# EAGLE board driver_schnellx (EAGLE 5.11)
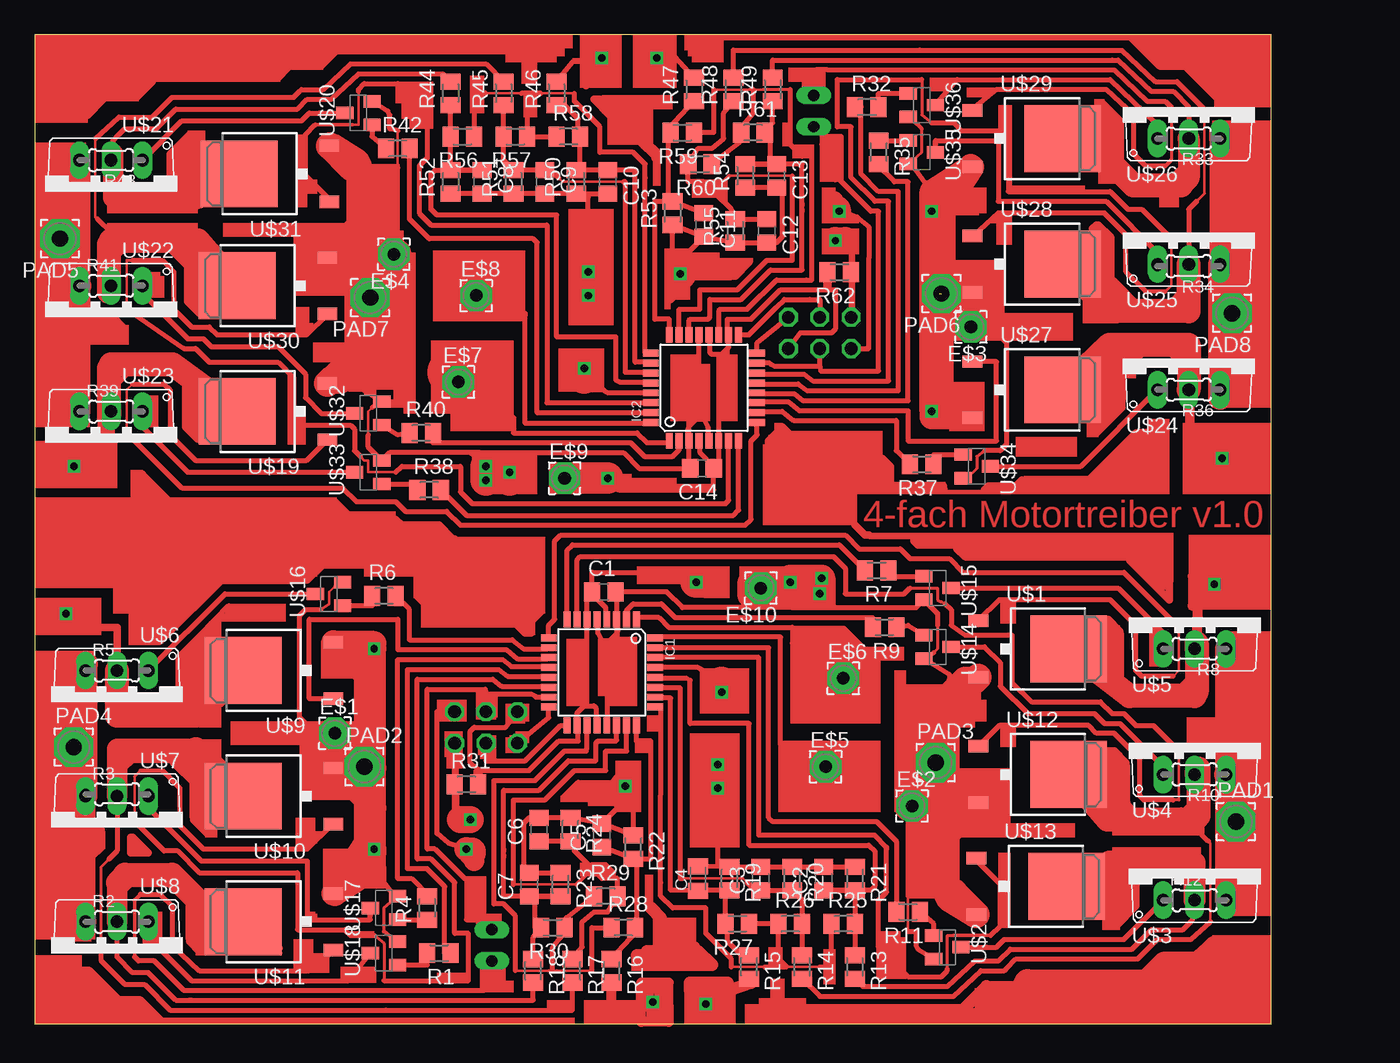
[diagram p0: board, top side]
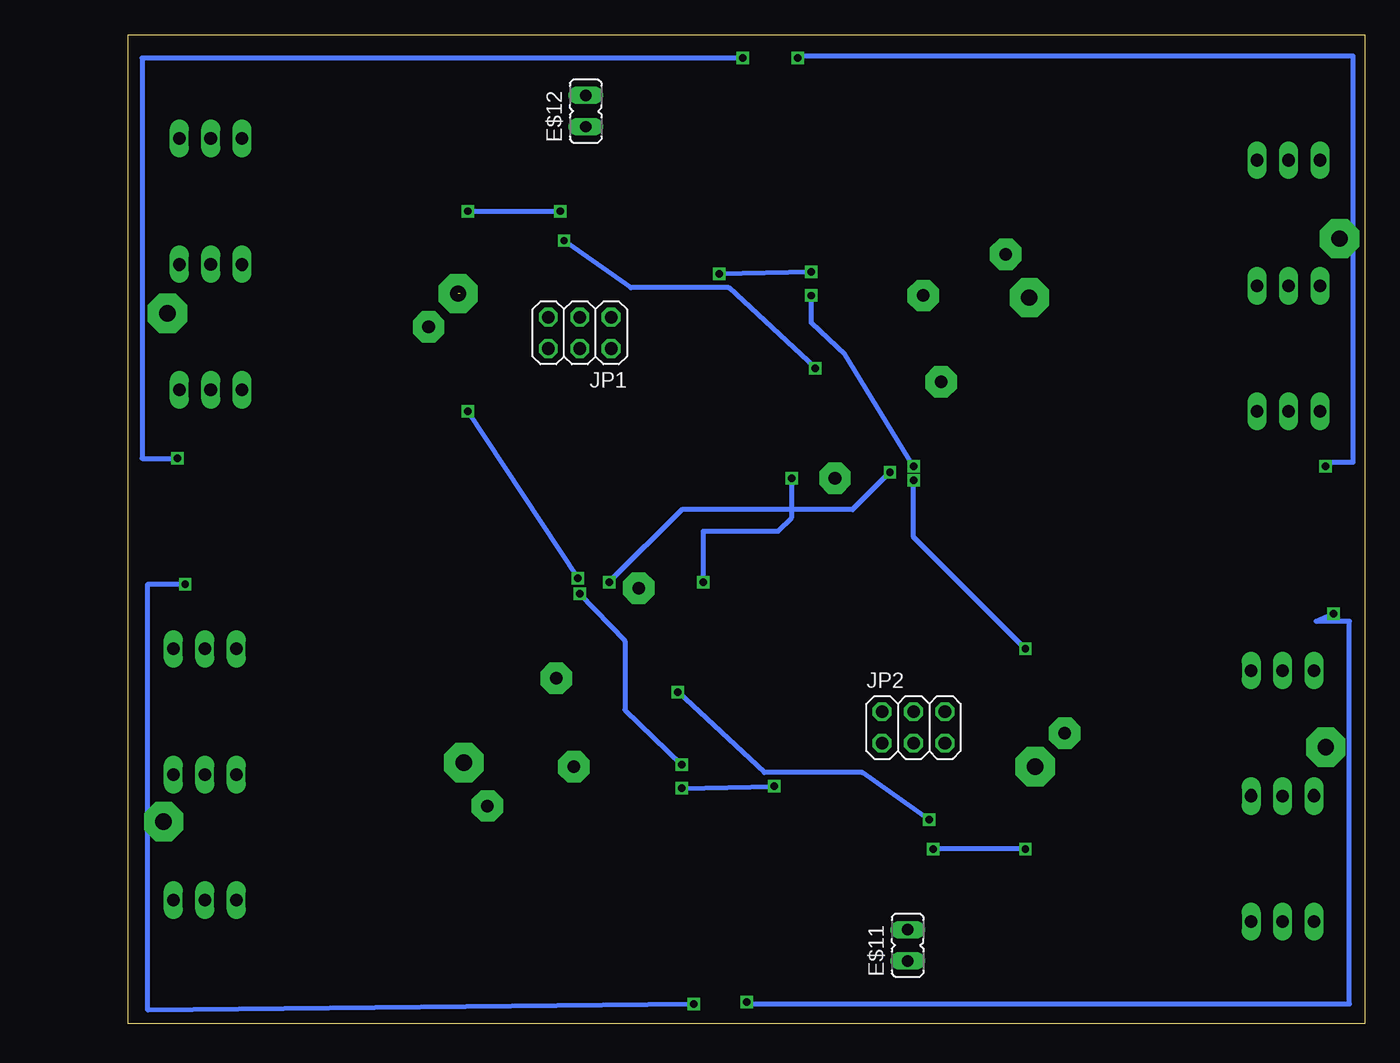
[diagram p1: board, bottom side, seen from below]

Size 100 x 80 mm. Coordinates in mm from the lower left corner, seen from the top.
Outline: 0,0 100,0 100,80 0,80 0,0
Copper layers (1*16): Top 0.035mm / dielectric 1.5mm / Bottom 0.035mm
Design rules "default": minimum track width 10mil, minimum drill 24mil, track to track 8mil, track to pad 8mil, pad to pad 8mil, via to via 8mil, smd to smd 8mil, copper to edge 40mil, drill to drill 8mil, minimum pad ring 10mil, minimum via ring 8mil, stop-mask expansion 4mil, vias tented up to drill 0mil, thermal gap 10mil
Net classes: 0 default: clearance 0.508 mm

## Footprints (pad centres in the part's own frame; a part is rotated, then mirrored left to right if it is on the bottom)
C0805 = smd 1.3 x 1.5: 1 -0.95,0; 2 0.95,0
C0805K = smd 1.3 x 1.6: 1 -1,0; 2 1,0
2,54/1,0 = drill 1.016 pad 2.54 octagon: 1 0,0
JP1Y = drill 0.914 long: 1 0,-1.27; 2 0,1.27
TQFP32-08 = smd 1.27 x 0.559: 1 -4.293,2.8; 2 -4.293,2; 3 -4.293,1.2; 4 -4.293,0.4; 5 -4.293,-0.4; 6 -4.293,-1.2; 7 -4.293,-2; 8 -4.293,-2.8; 17 4.293,-2.8; 18 4.293,-2; 19 4.293,-1.2; 20 4.293,-0.4; 21 4.293,0.4; 22 4.293,1.2; 23 4.293,2; 24 4.293,2.8 | smd 0.559 x 1.27: 9 -2.8,-4.293; 10 -2,-4.293; 11 -1.2,-4.293; 12 -0.4,-4.293; 13 0.4,-4.293; 14 1.2,-4.293; 15 2,-4.293; 16 2.8,-4.293; 25 2.8,4.293; 26 2,4.293; 27 1.2,4.293; 28 0.4,4.293; 29 -0.4,4.293; 30 -1.2,4.293; 31 -2,4.293; 32 -2.8,4.293
2X03 = drill 1.016 octagon: 1 -2.54,-1.27; 2 -2.54,1.27; 3 0,-1.27; 4 0,1.27; 5 2.54,-1.27; 6 2.54,1.27
3,17/1,3 = drill 1.321 pad 3.175 octagon: 1 0,0
M0805 = smd 1.3 x 1.6: 1 -0.95,0; 2 0.95,0
0204/5 = drill 0.813 octagon: 1 -2.54,0; 2 2.54,0
TO252 = smd 1 x 1.6: 1 -2.28,-4.8; 2 2.28,-4.8 | smd 5.4 x 6.2: 3 0,2.5
SOT23-BEC = smd 1 x 1.4: B -0.95,-1.1; C 0,1.1; E 0.95,-1.1
TO220V = drill 1.016 long: 1 -2.54,-2.54; 2 0,-2.54; 3 2.54,-2.54

## Placement (x,y rotation side)
C1  [C0805]  46.04,34.92 0 top
C2  [C0805]  63.82,11.75 90 top
C3  [C0805]  58.74,11.75 90 top
C4  [C0805K]  53.66,11.75 90 top
C5  [C0805]  45.88,15.24 90 top
C6  [C0805]  40.8,15.72 90 top
C7  [C0805]  40.01,11.27 90 top
C8  [C0805]  36.2,68.1 270 top
C9  [C0805]  41.27,68.1 270 top
C10  [C0805]  46.35,68.1 270 top
C11  [C0805]  54.13,64.61 270 top
C12  [C0805]  59.21,64.13 270 top
C13  [C0805]  60.01,68.58 270 top
C14  [C0805]  53.98,44.93 180 top
E$1  [2,54/1,0]  24.29,23.5 0 top
E$2  [2,54/1,0]  70.96,17.62 0 top
E$3  [2,54/1,0]  75.72,56.36 180 top
E$4  [2,54/1,0]  29.05,62.23 180 top
E$5  [2,54/1,0]  63.98,20.8 0 top
E$6  [2,54/1,0]  65.41,27.94 0 top
E$7  [2,54/1,0]  34.29,51.91 0 top
E$8  [2,54/1,0]  35.72,58.9 0 top
E$9  [2,54/1,0]  42.86,44.13 0 top
E$10  [2,54/1,0]  58.74,35.24 180 top
E$11  [JP1Y]  36.99,6.35 0 bottom
E$12  [JP1Y]  63.02,73.82 0 bottom
IC1  MEGA8-AI  [TQFP32-08]  45.88,28.42 270 top
IC2  MEGA8-AI  [TQFP32-08]  54.13,51.44 90 top
JP1  ISP 1  [2X03]  63.5,55.88 180 bottom
JP2  ISP 1  [2X03]  36.51,23.97 0 bottom
PAD1  11,1V_Motor1  [3,17/1,3]  97.16,16.35 0 top
PAD2  GND  [3,17/1,3]  26.67,20.8 0 top
PAD3  GND  [3,17/1,3]  72.87,21.11 0 top
PAD4  11,1V_Motor2  [3,17/1,3]  3.18,22.38 0 top
PAD5  11,1V_Motor1  [3,17/1,3]  2.06,63.5 180 top
PAD6  GND  [3,17/1,3]  73.34,59.05 180 top
PAD7  GND  [3,17/1,3]  27.15,58.74 180 top
PAD8  11,1V_Motor2  [3,17/1,3]  96.84,57.47 180 top
R1  [M0805]  32.7,5.72 180 top
R2  [0204/5]  6.67,8.26 0 top
R3  [0204/5]  6.67,18.57 0 top
R4  [M0805]  31.75,9.37 90 top
R5  [0204/5]  6.67,28.57 0 top
R6  [M0805]  28.26,34.61 0 top
R7  [M0805]  68.1,36.67 180 top
R8  [0204/5]  93.82,30.32 180 top
R9  [M0805]  68.74,32.07 180 top
R10  [0204/5]  93.82,20.16 180 top
R11  [M0805]  70.64,9.05 180 top
R12  [0204/5]  93.82,10 0 top
R13  4,7k  [M0805]  66.36,4.6 270 top
R14  4,7k  [M0805]  62.07,4.6 270 top
R15  4,7k  [M0805]  57.78,4.6 270 top
R16  4,7k  [M0805]  46.67,4.29 270 top
R17  4,7k  [M0805]  43.5,4.29 270 top
R18  4,7k  [M0805]  40.32,4.29 270 top
R19  1,2k  [M0805]  56.2,11.75 270 top
R20  1,2k  [M0805]  61.28,11.75 270 top
R21  1,2k  [M0805]  66.36,11.75 270 top
R22  1,2k  [M0805]  48.42,14.29 270 top
R23  1,2k  [M0805]  42.55,11.27 270 top
R24  1,2k  [M0805]  43.34,15.72 270 top
R25  1,2k  [M0805]  65.4,8.1 0 top
R26  1,2k  [M0805]  61.12,8.1 0 top
R27  1,2k  [M0805]  56.83,8.1 180 top
R28  1,2k  [M0805]  47.62,7.78 0 top
R29  1,2k  [M0805]  46.2,10.32 0 top
R30  1,2k  [M0805]  41.91,7.78 180 top
R31  [M0805]  34.92,19.37 0 top
R32  [M0805]  67.31,74.14 0 top
R33  [0204/5]  93.34,71.6 180 top
R34  [0204/5]  93.34,61.28 180 top
R35  [M0805]  68.26,70.48 270 top
R36  [0204/5]  93.34,51.28 180 top
R37  [M0805]  71.75,45.24 180 top
R38  [M0805]  31.91,43.18 0 top
R39  [0204/5]  6.19,49.53 0 top
R40  [M0805]  31.27,47.78 0 top
R41  [0204/5]  6.19,59.69 0 top
R42  [M0805]  29.37,70.8 0 top
R43  [0204/5]  6.19,69.85 180 top
R44  4,7k  [M0805]  33.66,75.25 90 top
R45  4,7k  [M0805]  37.94,75.25 90 top
R46  4,7k  [M0805]  42.23,75.25 90 top
R47  4,7k  [M0805]  53.34,75.56 90 top
R48  4,7k  [M0805]  56.52,75.56 90 top
R49  4,7k  [M0805]  59.69,75.56 90 top
R50  1,2k  [M0805]  43.81,68.1 90 top
R51  1,2k  [M0805]  38.74,68.1 90 top
R52  1,2k  [M0805]  33.66,68.1 90 top
R53  1,2k  [M0805]  51.59,65.56 90 top
R54  1,2k  [M0805]  57.47,68.58 90 top
R55  1,2k  [M0805]  56.67,64.13 90 top
R56  1,2k  [M0805]  34.61,71.76 180 top
R57  1,2k  [M0805]  38.89,71.76 180 top
R58  1,2k  [M0805]  43.18,71.75 0 top
R59  1,2k  [M0805]  52.39,72.07 180 top
R60  1,2k  [M0805]  53.82,69.53 180 top
R61  1,2k  [M0805]  58.1,72.07 0 top
R62  [M0805]  65.09,60.8 180 top
U$1  IRLR024  [TO252]  81.12,30.32 270 top
U$2  SMTBA42  [SOT23-BEC]  73.82,6.19 270 top
U$3  IRF9Z34N  [TO220V]  93.82,12.54 0 top
U$4  IRF9Z34N  [TO220V]  93.82,22.7 0 top
U$5  IRF9Z34N  [TO220V]  93.82,32.86 0 top
U$6  IRF9Z34N  [TO220V]  6.67,26.04 180 top
U$7  IRF9Z34N  [TO220V]  6.67,15.88 180 top
U$8  IRF9Z34N  [TO220V]  6.67,5.72 180 top
U$9  IRLR024  [TO252]  19.37,28.58 90 top
U$10  IRLR024  [TO252]  19.37,18.42 90 top
U$11  IRLR024  [TO252]  19.37,8.26 90 top
U$12  IRLR024  [TO252]  81.12,20.16 270 top
U$13  IRLR024  [TO252]  80.96,11.11 270 top
U$14  SMTBA42  [SOT23-BEC]  73.03,30.48 270 top
U$15  SMTBA42  [SOT23-BEC]  73.03,35.24 270 top
U$16  SMTBA42  [SOT23-BEC]  23.81,34.77 90 top
U$17  SMTBA42  [SOT23-BEC]  28.26,9.37 90 top
U$18  SMTBA42  [SOT23-BEC]  28.26,5.72 90 top
U$19  IRLR024  [TO252]  18.89,49.53 90 top
U$20  SMTBA42  [SOT23-BEC]  26.19,73.66 90 top
U$21  IRF9Z34N  [TO220V]  6.19,67.31 180 top
U$22  IRF9Z34N  [TO220V]  6.19,57.15 180 top
U$23  IRF9Z34N  [TO220V]  6.19,46.99 180 top
U$24  IRF9Z34N  [TO220V]  93.34,53.82 0 top
U$25  IRF9Z34N  [TO220V]  93.34,63.98 0 top
U$26  IRF9Z34N  [TO220V]  93.34,74.14 0 top
U$27  IRLR024  [TO252]  80.64,51.28 270 top
U$28  IRLR024  [TO252]  80.64,61.44 270 top
U$29  IRLR024  [TO252]  80.64,71.6 270 top
U$30  IRLR024  [TO252]  18.89,59.69 90 top
U$31  IRLR024  [TO252]  19.05,68.74 90 top
U$32  SMTBA42  [SOT23-BEC]  26.99,49.37 90 top
U$33  SMTBA42  [SOT23-BEC]  26.99,44.61 90 top
U$34  SMTBA42  [SOT23-BEC]  76.2,45.08 270 top
U$35  SMTBA42  [SOT23-BEC]  71.75,70.48 270 top
U$36  SMTBA42  [SOT23-BEC]  71.75,74.29 270 top

## Library data of the parts
C1-C3 C5-C14 R1-R62 = rcl
C4 = resistor
E$1-E$10 PAD1-PAD8 = wirepad
E$11 E$12 = jumper
IC1 IC2 = atmel; MPN: ATMEGA8-16AU; OC_FARNELL: 9171371; OC_NEWARK: 73M8863
JP1 JP2 = pinhead
U$1 U$3-U$13 U$19 U$21-U$31 = transistor-fet
U$2 U$14-U$18 U$20 U$32-U$36 = transistor-npn

## Nets
+5V: C1.1 C14.1 IC1.4 IC1.6 IC1.18 IC1.20 IC2.4 IC2.6 IC2.18 IC2.20 JP1.2 JP2.2
+12V: PAD4.1 R2.1 R3.1 R5.1 U$6.3 U$7.3 U$8.3
+12V1: PAD8.1 R33.1 R34.1 R36.1 U$24.3 U$25.3 U$26.3
GND: C1.2 C2.2 C3.2 C4.2 C5.2 C6.2 C7.2 C8.2 C9.2 C10.2 C11.2 C12.2 C13.2 C14.2 IC1.3 IC1.5 IC1.21 IC2.3 IC2.5 IC2.21 PAD2.1 PAD3.1 PAD6.1 PAD7.1 R19.1 R20.1 R21.1 R22.1 R23.1 R24.1 R50.1 R51.1 R52.1 R53.1 R54.1 R55.1 U$1.2 U$2.E U$9.2 U$10.2 U$11.2 U$12.2 U$13.2 U$14.E U$15.E U$16.E U$17.E U$18.E U$19.2 U$20.E U$27.2 U$28.2 U$29.2 U$30.2 U$31.2 U$32.E U$33.E U$34.E U$35.E U$36.E
N$2: IC1.16 JP2.1
N$3: C5.1 IC1.24 R16.1 R22.2 R28.2
N$4: U$11.1
N$5: IC1.14 U$10.1
N$6: IC1.13 R1.1
N$7: R12.1 U$2.C U$3.1
N$8: R8.2 U$5.1 U$15.C
N$9: R10.2 U$4.1 U$14.C
N$10: R9.1 U$14.B
N$11: C6.1 IC1.23 R17.1 R24.2 R29.2
N$12: C7.1 IC1.22 R18.1 R23.2 R30.2
N$13: R7.1 U$15.B
N$14: IC1.8 R7.2
N$15: IC1.19 R28.1 R29.1 R30.1
N$16: R47.2
N$17: R2.2 U$8.1 U$18.C
N$18: R1.2 U$18.B
N$19: R18.2 U$8.2 U$11.3
N$20: R17.2 U$7.2 U$10.3
N$21: IC1.11 U$9.1
N$22: IC1.12 R4.2
N$23: IC1.10 R6.2
N$24: R13.2 U$3.2 U$13.3
N$25: IC1.9 U$1.1
N$26: R3.2 U$7.1 U$17.C
N$27: IC1.7 U$12.1
N$28: R15.2 U$1.3 U$5.2
N$29: R14.2 U$4.2 U$12.3
N$30: IC1.2 R9.2
N$31: IC1.30 U$13.1
N$32: IC1.31 R11.2
N$33: R4.1 U$17.B
N$34: R5.2 U$6.1 U$16.C
N$35: R6.1 U$16.B
N$36: R11.1 U$2.B
N$37: U$29.1
N$38: IC2.13 R32.1
N$39: IC2.14 U$28.1
N$40: IC1.17 JP2.3
N$41: R49.2 U$26.2 U$29.3
N$42: IC1.29 JP2.5 R31.1
N$43: R48.2 U$25.2 U$28.3
N$44: IC2.11 U$27.1
N$45: R44.2 U$21.2 U$31.3
N$46: IC2.9 U$19.1
N$47: IC2.7 U$30.1
N$48: R46.2
N$49: R45.2 U$22.2 U$30.3
N$50: R43.1 U$20.C U$21.1
N$51: R41.2 U$22.1 U$32.C
N$52: R40.1 U$32.B
N$53: R39.2 U$23.1 U$33.C
N$54: R38.1 U$33.B
N$55: R33.2 U$26.1 U$36.C
N$56: R32.2 U$36.B
N$57: IC2.12 R35.2
N$58: IC2.10 R37.2
N$59: R34.2 U$25.1 U$35.C
N$60: R35.1 U$35.B
N$61: R36.2 U$24.1 U$34.C
N$62: R37.1 U$34.B
N$63: R42.1 U$20.B
N$64: IC2.2 R40.2
N$65: C11.1 IC2.24 R47.1 R53.2 R59.2
N$66: C12.1 IC2.23 R48.1 R55.2 R60.2
N$67: C13.1 IC2.22 R49.1 R54.2 R61.2
N$68: IC2.19 R59.1 R60.1 R61.1
N$69: IC2.29 JP1.5 R62.1
N$70: IC2.16 JP1.1
N$71: IC2.17 JP1.3
N$72: IC2.30 U$31.1
N$73: IC2.31 R42.2
N$74: IC2.8 R38.2
S$9: E$2.1
S$19: E$4.1
S$22: U$24.2 U$27.3
S$45: U$19.3 U$23.2
S$67: U$6.2 U$9.3
S$103: IC1.15 JP2.4
S$104: IC2.15 JP1.4
S$109: E$11.1
S$110: E$11.2
S$111: JP2.6
S$113: JP1.6
VCC: PAD1.1 R8.1 R10.1 R12.2 U$3.3 U$4.3 U$5.3
VCC1: PAD5.1 R39.1 R41.1 R43.2 U$21.3 U$22.3 U$23.3
VDD: IC1.25 R25.1 R26.1 R27.1
VDD1: IC2.25 R56.1 R57.1 R58.1
VEE: C2.1 IC1.28 R13.1 R21.2 R25.2
VEE1: C8.1 IC2.28 R44.1 R52.2 R56.2
VPP: C3.1 IC1.27 R14.1 R20.2 R26.2
VPP1: C9.1 IC2.27 R45.1 R51.2 R57.2
VSS: C4.1 IC1.26 R15.1 R19.2 R27.2
VSS1: C10.1 IC2.26 R46.1 R50.2 R58.2

## Tracks (layer width: path | path; a pad name or v marks a point on that pad's centre or on a via)
+5V  (via drill 0.6)
  Top 0.406: IC1.4 46.2,32.79 46.2,33.66 45.09,34.76 C1.1 | C1.1 44.68,34.52 IC1.6 44.68,25.95 44.45,25.72 | IC1.20 45.4,24.2 45.4,25.56 45.24,25.72 44.45,25.72 | 44.45,25.72 43.88,25.15 IC1.18 43.97,24.03 43.97,22.86 42.39,22.86 40.01,20.48 36.04,20.48 | JP2.2 | JP2.2 38.1,23.97 35.56,23.97 35.24,23.65 35.24,21.11 36.04,20.48 | IC2.4 53.82,47.06 53.82,46.2 54.92,45.09 C14.1 | C14.1 55.33,45.34 IC2.6 55.33,53.91 55.56,54.13 | IC2.20 54.61,55.65 54.61,54.29 54.77,54.13 55.56,54.13 | 55.56,54.13 56.13,54.7 IC2.18 56.04,55.82 56.04,56.99 57.94,56.99 60.33,59.37 63.98,59.37 | JP1.2 | JP1.2 | JP1.2 61.91,55.88 64.45,55.88 64.77,56.2 64.77,59.37 64.29,59.37 | C1.1 45.09,36.51 52.7,36.51 54.45,35.72 | 43.18,44.13 47.31,43.18 54.93,43.18 54.92,43.18 C14.1 | 36.04,20.48 36.04,19.53 35.72,19.53 35.72,20.48 | 63.98,60.33 63.98,59.37 | 63.98,59.37 64.29,59.37 | 64.29,59.37 64.29,60.17
  Top 2.54: 54.45,35.72 v53.5,35.72 | v46.35,44.13 43.18,44.13
  Bottom 0.406: v53.5,35.72 53.5,39.85 47.47,39.85 46.35,40.96 v46.35,44.13
  other vias: 39.05,25.24 60.96,54.61
+12V
  Top 0.406: PAD4.1 2.38,21.59 2.38,19.68
  Top 1.422: U$7.3 U$8.3 2.7,8.26
  Top 1.778: 2.38,10 U$8.3 | U$8.3 | 2.38,9.53 2.7,8.26
  Top 1.93: R5.1 R3.1 U$7.3 2.54,18.41 2.38,18.57 | R5.1 | 2.38,26.83 R5.1 | 2.38,18.57 2.38,19.68 2.38,26.83 | 2.38,18.57 2.38,10 2.38,9.53 | 2.38,26.83 2.38,27.46 4.13,29.21 4.13,28.89
+12V1
  Top 0.406: PAD8.1 97.63,58.26 97.63,60.17
  Top 1.778: U$26.3 U$25.3 | 97.63,69.85 U$26.3 | U$26.3 | U$26.3 95.89,72.07 97.63,70.33
  Top 1.93: U$24.3 | U$24.3 R34.1 U$25.3 97.47,61.44 97.63,61.28 | 97.63,53.02 U$24.3 | 97.63,61.28 97.63,60.17 97.63,53.02 | 97.63,61.28 97.63,69.85 97.63,70.33 | 97.63,53.02 97.63,52.39 95.89,50.64 95.89,50.96
GND  (via drill 0.6)  (1 unrouted)
  Top 0.2: 70.64,10.32 70.64,7.46 | 29.37,69.22 29.37,72.23
  Top 0.22: 75.41,44.13 U$34.E | 27.3,49.85 26.99,49.53 26.99,47.62 | U$16.E 24.6,35.72 23.81,34.92 23.81,33.97 23.18,33.5
  Top 0.25: 75.41,44.13 76.2,44.93 76.2,45.88 76.83,46.35 | 71.75,72.39 71.75,70.48 U$35.E | 72.71,30 73.03,30.32 73.03,32.23 | U$17.E 28.26,9.38 28.26,7.46
  Top 0.305: U$36.E 70.34,73.5 | 71.75,72.39 71.13,73.01 | U$27.2 76.2,49 | U$9.2 23.81,30.86 | 29.04,6.84 28.26,7.46 | U$18.E 29.68,6.35
  Top 0.406: U$2.E 71.45,6.03 71.28,6.35 71.28,7.46 70.64,7.46 | 73.82,10.32 70.64,10.32 | R23.1 C7.2 39.53,12.7 39.53,16.19 40,16.67 C6.2 R24.1 C5.2 | U$20.E 28.56,73.82 28.73,73.5 28.73,72.39 29.37,72.23 | 76.83,46.35 78.11,46.35 78.58,46.83 78.58,55.09 74.93,58.74 73.18,58.74 | 26.19,69.22 29.37,69.22 | R54.1 C13.2 60.48,67.15 60.48,63.66 60.01,63.19 C12.2 R55.1 C11.2 | 73.82,25.56 73.98,28.27 U$14.E 72.08,29.54 72.71,30 | C5.2 47.47,17.78 | R21.1 R20.1 | IC1.5 45.56,32.47 45.56,31.59 45.88,30.96 46.51,30.96 | 71.13,73.01 U$36.E | 73.18,58.74 73.5,59.05 | 73.18,59.05 73.18,58.9 73.03,58.74 | R20.1 C2.2 | C5.2 R22.1 48.42,17.78 47.78,18.41 | R20.1 C3.2 R19.1 55.56,12.7 | IC1.21 46.28,30.72 46.51,30.96 | 73.03,58.74 73.18,58.74 | 67.47,61.91 67.47,64.45 66.52,65.25 64.93,65.88 | 73.03,58.74 73.03,49 U$27.2 | 55.56,12.7 C4.2 | 47.08,31.52 47.15,31.75 47.15,32.64 IC1.3 | 47.08,31.52 46.51,30.96 | U$35.E 71.28,69.06 72.55,67.31 | IC1.3 47.08,31.52 | 55.56,12.7 55.24,13.02 v55.24,19.05 | 26.04,54.29 26.04,51.58 U$32.E 27.93,50.31 27.3,49.85 | C11.2 52.55,62.07 | R51.1 R52.1 | IC2.5 54.45,47.38 54.45,48.26 54.13,48.9 53.5,48.9 | 73.03,32.23 73.03,33.19 U$15.E 71.29,33.66 63.98,33.66 64.77,33.66 v63.5,34.77 | IC1.3 47.08,34.83 C1.2 51.12,34.92 52.39,33.66 59.37,33.66 61.28,33.66 v61.12,35.72 61.12,36.04 | v65.09,65.72 | R51.1 | R51.1 C8.2 | C11.2 R53.1 51.59,62.07 52.23,61.44 | R51.1 C9.2 R50.1 44.45,67.15 | IC2.21 53.73,49.13 53.5,48.9 | 44.45,67.15 C10.2 | 52.93,48.33 52.86,48.1 52.86,47.21 IC2.3 | 52.93,48.33 53.5,48.9 | IC2.3 52.93,48.33 | 44.45,67.15 44.77,66.84 v44.77,60.8 | 26.99,47.62 26.99,46.66 U$33.E 28.73,46.2 36.04,46.2 35.24,46.2 v36.51,45.09
  Top 0.406: IC2.3 52.93,45.02 C14.2 48.9,44.93 47.62,46.2 40.64,46.2 38.73,46.2 v36.51,43.97 38.42,43.97 | 23.18,33.5 21.91,33.5 21.43,33.02 21.43,24.77 25.08,21.11 26.83,21.11 | 26.83,20.8 26.83,20.95 26.99,21.11 | U$9.2 26.99,30.86 26.99,21.11 | 32.54,18.57 32.54,15.4 33.5,14.61 35.4,13.97 | 26.83,21.11 26.99,21.11 | 26.51,20.8 26.83,21.11 | 26.51,20.8 PAD2.1 | 26.51,20.7 26.51,20.8 | 27.46,12.54 28.74,10.79 U$17.E | U$18.E 29.04,6.84 | 75.88,56.36 | 24.13,23.5 | v34.92,14.13
  Top 1.676: 64.77,65.88 64.61,66.52 | 35.4,13.81 35.56,13.18
  Top 1.93: 73.98,10.26 73.82,10.32 73.82,17.78 76.32,17.62 U$12.2 73.82,17.88 73.82,25.56 76.32,27.94 U$1.2 | 26.04,69.59 26.19,69.22 26.19,62.07 23.69,62.23 U$30.2 26.04,61.97 26.04,54.29 23.69,51.91 U$19.2 | v65.09,65.72 64.93,65.88 | U$27.2 73.18,51.66 73.18,56.49 U$28.2 72.55,59.16 | 75.72,69.37 72.55,67.31 v72.55,65.72 | v72.55,65.72 72.55,66.02 U$29.2 73.18,65.23 73.18,59.85 73.98,59.05 75.88,59.05 72.55,62.39 v72.55,65.72 | 72.55,59.16 v72.55,65.72 | 75.56,49.05 72.55,49.05 v72.55,49.53 72.55,59.16 | v61.12,35.72 61.75,34.45 | U$9.2 26.83,28.19 26.83,23.36 U$10.2 26.51,20.7 27.46,20.7 | 24.45,30.8 27.46,30.8 v27.46,30.32 27.46,20.7 | v34.92,14.13 35.4,13.97 | v27.46,14.13 27.46,13.83 U$11.2 26.83,14.62 26.83,20 26.04,20.8 24.13,20.8 27.46,17.46 v27.46,14.13 | v27.46,14.13 27.46,20.7 | v27.46,14.13 27.46,12.54 24.29,10.48 | v55.24,19.05 | v44.77,60.8
  Top 2.184: U$13.2 74.36,10.64 74.14,10.64 75.25,9.53 74.3,10.16 | 74.3,10.16 73.82,10.48 | 74.3,10.16 76.04,8.89 73.98,10.16 73.98,10.26 | 72.55,20.8 arc-90 PAD3.1 | 72.55,20.8 72.55,11.27 | U$31.2 25.65,69.22 25.88,69.22 24.77,70.33 25.72,69.69 | 72.55,20.8 72.55,25.08 75.25,27.78 76.06,27.78 U$1.2 | 25.72,69.69 26.19,69.37 | 25.72,69.69 23.97,70.96 26.04,69.69 26.04,69.59 | 27.46,58.9 arc-90 PAD7.1 | 27.46,58.9 27.46,68.42 | 27.46,58.9 27.46,54.77 24.77,52.07 23.95,52.07 U$19.2 | 64.93,65.88 64.77,65.88 | 61.12,36.04 v63.66,36.04 | 35.4,13.97 35.4,13.81
  Top 2.54: 73.18,59.05 75.88,56.36 | v47.78,19.21 47.78,18.41 | v55.24,20.95 v55.24,19.05 | v52.23,60.64 52.23,61.44 | v61.12,35.72 v63.5,34.77 | v44.77,58.9 v44.77,60.8 | 26.83,20.8 24.13,23.5 | 38.42,43.97 v38.42,44.61 | v36.51,43.97 v36.51,45.09
  Bottom 0.406: v55.24,19.05 v47.78,19.21 | v55.24,19.05 | v72.55,65.72 v65.09,65.72 | v55.24,20.95 59.85,25.4 59.85,30.96 v63.5,34.77 | v63.66,36.04 v72.55,49.53 | v44.77,60.8 v52.23,60.64 | v44.77,60.8 | v61.12,35.72 | v61.12,35.72 55.24,41.59 41.43,41.59 v38.42,44.61 | v44.77,58.9 44.77,56.67 42.07,54.13 v36.51,45.09 | v36.51,43.97 36.59,43.97 36.59,44.05 | 36.59,44.05 v36.51,43.97 | v36.51,43.97 36.59,44.05 | v36.51,43.97 | v36.51,43.97 | v36.51,43.97 36.51,39.37 v27.46,30.32 | v27.46,14.13 v34.92,14.13
N$2  (via drill 0.6)
  Top 0.406: IC1.16 41.59,24.76 JP2.1 39.05,22.28 JP2.1
  other vias: 39.05,22.7
N$3
  Top 0.406: R16.1 48.74,7.46 R28.2 48.73,7.78 48.74,9.21 | 48.74,9.21 | 48.74,9.21 48.74,13.34 | 48.74,13.34 R22.2 C5.1 | 48.74,13.34 49.85,13.34 49.85,22.86 48.68,22.86 IC1.24
N$4
  Top 0.3: 8.1,5.4 8.1,10
  Top 0.305: 8.1,10 8.57,10.48
  Top 0.406: U$11.1 24.17,5.71 23.97,5.71 22.23,4.29 13.34,4.29 11.11,6.35 11.11,9.53 10.16,10.48 8.57,10.48 | 8.1,5.4 8.41,5.08 9.68,5.08 12.06,2.7 35.88,2.7
N$5
  Top 0.22: 8.1,16.35 8.1,20
  Top 0.254: 8.1,20 8.57,20.48
  Top 0.26: 27.46,7.14 28.26,6.51 28.26,3.49
  Top 0.305: 8.57,20.48 10.32,20.48
  Top 0.406: U$10.1 24.07,16.14 22.07,14.13 13.65,14.13 11.75,16.03 11.75,19.05 10.32,20.48 | 8.1,16.35 10.48,13.97 11.59,13.97 13.34,12.22 21.27,12.22 21.27,7.62 25.08,7.62 25.56,7.14 27.46,7.14 | 28.26,3.49 35.08,3.49 35.08,7.3 33.97,7.3 33.97,11.43 32.07,13.34 30.96,13.34 30.96,27.86 37.07,27.86 37.78,27.3 41.5,27.3 IC1.14
N$6
  Top 0.406: R1.1 33.18,5.71 33.18,11.11 | 33.18,11.11 | 33.18,11.11 31.75,12.54 30.16,12.54 30.16,28.66 37.54,28.66 38.26,28.1 41.5,28.1 IC1.13
N$7
  Top 0.406: U$3.1 88.11,6.83 78.42,6.83 77.79,6.19 | U$2.C 76.99,6.19 | 76.99,6.19 | 76.99,6.19 77.79,6.19 | 76.99,6.19 77.79,6.19 | U$3.1
N$8
  Top 0.406: U$5.1 91.28,31.59 87.63,35.24 U$15.C | U$5.1 | U$5.1
N$9
  Top 0.406: U$4.1 91.28,20.8 87.79,24.29 86.52,24.29 85.72,25.08 80.33,25.08 78.11,27.3 78.11,29.21 76.83,30.48 74.44,30.48 U$14.C | U$4.1 | U$4.1
N$10
  Top 0.406: U$14.B 70.64,32.22 R9.1
N$11
  Top 0.2: 43.81,11.27 38.73,11.27
  Top 0.305: 45.09,12.54 43.81,11.27
  Top 0.406: R17.1 44.29,6.19 44.29,8.26 45.24,9.05 46.35,9.05 R29.2 47.15,11.75 45.88,11.75 43.66,13.97 | 43.66,13.97 43.66,14.76 | 43.66,14.76 R24.2 C6.1 41.12,14.76 43.66,14.76 | 43.66,13.97 45.09,12.54 | IC1.23 47.88,22.07 46.2,22.07 46.2,20.48 43.66,20.48 41.27,18.1 38.73,18.1 38.73,11.27
N$12
  Top 0.406: R18.1 40.32,6.99 R30.2 | R30.2 | R30.2 41.12,7.78 | 41.12,7.78 40.8,7.78 | 41.12,7.78 40.48,7.78 40.48,10.16 40.64,10.32 R23.2 C7.1 37.94,10.32 37.94,13.49 37.94,13.65 37.94,13.97 37.94,14.13 37.94,18.89 40.8,18.89 43.18,21.27 45.4,21.27 45.4,22.7 45.56,22.86 46.99,22.86 47.08,22.95 IC1.22
N$13
  Top 0.406: U$15.B 69.53,36.19 R7.1
N$14
  Top 0.406: R7.2 65.09,38.73 43.5,38.73 43.08,38.32 IC1.8
N$15
  Top 0.2: 42.22,4.29 45.09,4.29 | 38.89,4.29 41.59,4.29
  Top 0.254: 41.91,4.29 42.22,4.29 41.91,4.29 41.59,4.29
  Top 0.406: R29.1 43.81,9.21 43.02,8.57 R30.1 42.54,6.99 41.91,6.19 41.91,4.29 | R28.1 46.51,7.78 45.09,7.78 | 45.09,4.29 45.09,7.78 | 45.09,7.78 | 38.89,4.29 38.89,8.73 37.94,9.68 37.15,9.68 37.15,13.81 37.15,14.45 37.15,19.68 37.62,19.68 40.48,19.68 42.86,22.07 44.61,22.07 44.68,22.31 IC1.19
N$16
  Top 0.406: R47.2 51.75,78.27
N$17
  Top 0.406: U$18.C 25.4,3.49 12.7,3.49 9.21,6.99 U$8.1 | U$8.1
N$18
  Top 0.406: R1.2 31.75,4.76 U$18.B
N$19
  Top 0.406: U$8.2 6.67,5.4 7.94,4.13 9.21,4.12 11.43,1.91 12.54,1.91 12.7,1.91 40.32,1.91 R18.2
  Top 1.676: U$8.2 6.67,11.43
  Top 1.778: 6.67,11.43 7.3,12.06
  Top 1.93: U$11.3 14.92,8.26 11.11,12.06 7.3,12.06
N$20
  Top 0.25: 5.4,6.35 5.4,12.7
  Top 0.254: 5.4,12.7 6.03,13.34
  Top 0.406: 6.03,13.34 6.67,13.97 U$7.2 | R17.2 43.5,1.11 28.42,1.11 10.95,1.11 8.89,3.17 7.3,3.17 5.4,5.08 5.4,6.35
  Top 1.676: 13.06,22.23 6.67,22.23 U$7.2
  Top 1.93: 13.06,22.23 U$10.3
N$21
  Top 0.406: U$9.1 22.23,26.3 22.23,32.7 29.37,32.7 29.37,30.26 38.16,30.26 39.05,29.53 41.5,29.53 IC1.11
N$22
  Top 0.406: R4.2 31.91,10.32 30.48,11.75 29.37,11.75 29.37,29.46 37.85,29.46 38.58,28.89 41.51,28.89 IC1.12
N$23
  Top 0.406: R6.2 30.32,33.5 30.32,31.06 38.63,31.06 39.53,30.32 41.49,30.32 IC1.10
N$24
  Top 0.406: R13.2 66.99,3.02 73.82,3.02 76.04,5.08 77.95,5.08 78.9,6.03 88.74,6.03 90.33,7.62 92.87,7.62 93.19,7.94 | 93.19,7.94 | 93.19,7.94 93.66,8.41 93.66,9.84 U$3.2
  Top 1.778: 86.95,13.02 93.82,13.02 U$3.2
  Top 1.93: 86.95,13.02 U$13.3
N$25
  Top 0.22: 92.08,28.1 92.55,28.57 92.55,32.07
  Top 0.406: U$1.1 78.01,34.29 87,34.29 89.06,32.23 89.06,28.57 89.53,28.1 92.08,28.1 | 92.55,32.07 88.11,36.51 75.09,36.51 73.98,37.62 70.8,37.62 70.01,38.42 66.67,38.42 65.56,39.53 42.55,39.53 42.07,39.05 42.07,32.7 41.59,32.22 IC1.9
N$26
  Top 0.406: U$17.C 27.16,8.74 27.15,8.41 22.07,8.41 22.07,13.18 13.49,13.18 9.21,17.46 U$7.1 R3.2
N$27
  Top 0.22: 92.55,22.07 92.55,18.1 | 73.34,34.13 73.66,33.97
  Top 0.25: 73.34,34.13 73.03,34.29 73.03,35.24 70.8,35.24
  Top 0.254: 92.55,18.1 92.08,18.1
  Top 0.406: U$12.1 78.01,24.13 85.25,24.13 85.88,23.5 87.31,23.5 89.38,21.43 89.38,18.41 89.69,18.1 92.08,18.1 | 92.55,22.07 90.49,24.13 89.06,24.13 88.11,25.08 87.15,25.08 86.2,26.04 80.64,26.04 79.06,27.62 79.06,31.43 75.25,31.43 74.14,32.23 74.14,33.5 73.66,33.97 | 73.66,33.97 | 70.8,35.24 70.33,34.77 65.56,34.77 65.56,36.83 64.61,37.78 44.13,37.78 43.88,37.53 IC1.7
N$28  (via drill 0.6)
  Top 0.406: 93.82,31.27 U$5.2 93.82,35.56 v95.41,35.56 | R15.2 58.26,3.65 v54.29,1.59
  Top 0.813: 93.98,30.64 94.14,35.4 96.84,35.4 96.84,34.77 94.3,34.77 94.3,33.97 96.84,33.97 96.84,36.2 93.66,36.2 93.66,33.81
  Top 1.676: 93.98,30.64 93.82,30.48 U$5.2
  Top 1.93: U$1.3 88.54,26.51 93.82,26.51 93.98,26.83 93.98,30.64 93.98,30.8
  Bottom 0.406: v54.29,1.59 98.42,1.11 98.42,35.56 v95.41,35.56
N$29
  Top 0.22: 94.93,14.76 95.09,14.61 95.09,8.26
  Top 0.406: 93.82,16.51 93.82,15.88 94.93,14.76 | R14.2 63.5,2.22 74.3,2.22 76.52,4.29 78.42,4.29 78.58,4.45 79.38,5.24 89.22,5.24 90.81,6.83 93.5,6.83 95.09,8.26
  Top 1.676: 94.14,20.64 93.82,20.32 U$4.2
  Top 1.93: U$12.3 86.8,16.51 93.82,16.51 94.14,16.83 94.14,20.64
N$30
  Top 0.406: IC1.2 47.88,33.43 48.42,33.97 50.69,33.97 51.8,32.86 67.79,32.86 R9.2
N$31
  Top 0.25: 74.3,7.14 73.82,7.14 73.82,4.45
  Top 0.3: 74.3,7.14 77.31,7.14
  Top 0.406: U$13.1 76.16,13.21 78.11,11.27 78.11,7.94 77.31,7.14 | 73.82,4.45 73.82,4.29 73.34,3.81 70.64,3.81 68.26,6.19 68.26,10 68.9,10.64 68.9,14.13 68.9,14.29 67.94,15.24 58.58,15.24 58.58,29.62 IC1.30
N$32
  Top 0.406: R11.2 69.69,14.76 68.1,16.35 59.69,16.35 59.37,16.67 59.37,30.42 IC1.31
N$33
  Top 0.406: R4.1 U$17.B
N$34
  Top 0.406: U$16.C 15.4,34.77 R5.2 | R5.2
N$35
  Top 0.406: U$16.B 27.31,33.82 R6.1
N$36
  Top 0.406: R11.1 72.72,8.08 U$2.B
N$37
  Top 0.254: 91.92,74.14 91.92,69.85
  Top 0.305: 91.92,69.85 91.44,69.37
  Top 0.406: U$29.1 75.84,74.14 76.04,74.14 77.79,75.56 86.68,75.56 88.9,73.5 88.9,70.33 89.85,69.37 91.44,69.37 | 91.92,74.14 91.44,74.61 90.01,74.61 87.31,77.15 64.14,77.15
N$38
  Top 0.406: R32.1 66.83,74.14 66.83,68.74 | 66.83,68.74 | 66.83,68.74 68.26,67.31 69.85,67.31 69.85,51.19 62.47,51.19 61.75,51.75 58.51,51.75 IC2.13
N$39
  Top 0.22: 91.92,63.5 91.92,59.69
  Top 0.25: 72.55,72.87 71.75,73.5 71.75,76.36
  Top 0.254: 91.92,59.69 91.44,59.21
  Top 0.305: 91.44,59.21 89.85,59.21
  Top 0.406: U$28.1 75.94,63.72 77.95,65.56 86.52,65.56 88.27,63.82 88.27,60.8 89.85,59.21 | 91.92,63.5 89.53,65.88 88.42,65.88 87,67.31 78.74,67.31 78.74,72.23 74.93,72.23 74.3,72.87 72.55,72.87 | 71.75,76.36 64.93,76.36 64.93,72.55 66.04,72.55 66.04,68.42 67.94,66.52 69.06,66.52 69.06,51.99 62.94,51.99 62.23,52.55 58.52,52.55 IC2.14
N$40  (via drill 0.6)
  Top 0.406: JP2.3 36.51,21.27 37.31,21.27 39.69,21.27 40.32,21.91 42.55,24.13 IC1.17 | JP2.3
  other vias: 36.51,22.7
N$41
  Top 0.406: U$26.2 93.34,74.14 92.08,75.41 90.33,75.41 87.63,77.95 | R49.2 59.69,77.95 87.15,77.95 87.63,77.95 | 87.63,77.95
  Top 1.778: 92.71,67.79 93.34,68.42 U$26.2
  Top 1.93: U$29.3 85.09,71.6 88.9,67.79 92.71,67.79
N$42  (via drill 0.6)
  Top 0.406: JP2.5 | 33.97,20.64 33.97,20.95 JP2.5 | 33.97,18.58 33.97,20.64 | 33.97,18.58 R31.1 | JP2.5 | 33.97,20.64 JP2.5 | 33.97,18.58 33.97,17.78 v35.24,16.51 | IC1.29 53.66,28.82 53.82,28.73 | 53.82,28.73 | 55.56,27.62 53.82,28.73 | v55.56,26.83 55.56,26.67
  Top 2.184: v35.24,16.51 34.45,16.51
  Top 2.54: 55.56,26.67 55.56,27.62
  Bottom 0.406: v55.56,26.83 48.58,20.32 40.64,20.32 v35.24,16.51
  other vias: 33.97,22.7
N$43
  Top 0.22: 94.61,73.5 94.61,67.15
  Top 0.254: 94.61,67.15 93.98,66.52
  Top 0.406: 93.34,57.63 93.34,65.88 93.98,66.52 | R48.2 56.52,78.74 71.6,78.74 87.95,78.74 90.65,76.2 92.39,76.2 94.61,73.98 94.61,73.5
  Top 1.93: U$28.3 86.95,57.63 93.34,57.63 U$25.2
N$44
  Top 0.406: U$27.1 77.79,53.56 77.79,47.15 70.64,47.15 70.64,49.59 61.85,49.59 60.96,50.32 58.52,50.32 IC2.11
N$45
  Top 0.406: R44.2 33.02,76.83 26.19,76.83 23.97,74.77 22.07,74.77 21.27,73.98 11.43,73.98 9.84,72.39 7.3,72.39 6.83,71.91 | 6.83,71.91 | 6.83,71.91 6.35,71.44 6.35,70.33 6.35,70.01 U$21.2
  Top 1.676: 13.06,66.83 6.35,66.83 6.35,70.33
  Top 1.93: 13.06,66.83 U$31.3
N$46
  Top 0.22: 7.94,51.75 7.46,51.28 7.46,47.78
  Top 0.406: U$19.1 22,45.56 13.02,45.56 10.95,47.62 10.95,51.28 10.48,51.75 7.94,51.75 | 7.46,47.78 11.91,43.34 24.92,43.34 26.04,42.23 29.21,42.23 30,41.43 33.34,41.43 34.45,40.32 57.47,40.32 57.94,40.8 57.94,47.15 58.43,47.63 IC2.9
N$47
  Top 0.22: 7.46,57.78 7.46,61.75 | 26.35,45.88 26.67,45.56 26.99,45.56 26.99,44.61 29.21,44.61
  Top 0.254: 7.46,61.75 7.94,61.75
  Top 0.406: U$30.1 22,55.72 14.76,55.72 14.13,56.36 12.7,56.36 11.27,57.78 11.27,60.8 10.32,61.75 7.94,61.75 | 7.46,57.78 12.06,54.61 13.02,54.61 14.13,53.5 19.68,53.5 20.95,52.23 20.95,48.42 | 20.95,48.42 | 20.95,48.42 25.56,48.42 25.88,48.1 25.88,46.35 26.35,45.88 | 26.35,45.88 | 29.21,44.61 29.69,45.09 34.45,45.09 34.45,43.02 35.4,42.07 55.88,42.07 56.13,42.32 IC2.7
N$48
  Top 0.406: R46.2 43.5,77.79
N$49
  Top 0.22: 5.08,65.09 4.92,65.25 4.92,71.6
  Top 0.406: 6.19,63.34 6.19,63.98 5.08,65.09 | R45.2 36.51,77.63 25.56,77.63 23.34,75.56 21.59,75.56 21.43,75.41 20.95,74.93 11.11,74.93 9.53,73.34 6.83,73.34 4.92,71.6
  Top 1.422: 6.03,59.21 6.19,59.53 U$22.2
  Top 1.93: U$30.3 13.22,63.34 6.19,63.34 6.03,63.02 6.03,59.21
N$50
  Top 0.406: U$21.1 11.91,73.03 21.59,73.03 22.23,73.66 | 23.02,73.66 U$20.C | 23.02,73.66 | 22.23,73.66 23.02,73.66 | 22.23,73.66 23.02,73.66 | U$21.1
N$51
  Top 0.406: U$22.1 8.73,59.05 12.38,55.4 13.65,55.4 14.29,54.77 19.68,54.77 21.91,52.55 21.91,50.64 23.18,49.37 25.57,49.37 U$32.C | U$22.1 | U$22.1
N$52
  Top 0.406: U$32.B 29.37,47.63 R40.1
N$53
  Top 0.406: U$23.1 8.73,48.26 12.38,44.61 U$33.C | U$23.1 | U$23.1
N$54
  Top 0.406: U$33.B 30.48,43.66 R38.1
N$55
  Top 0.406: U$36.C 74.61,76.36 87,76.36 90.65,72.87 U$26.1 | U$26.1
N$56
  Top 0.406: R32.2 68.26,75.25 U$36.B
N$57
  Top 0.406: R35.2 68.1,69.53 69.53,68.1 70.64,68.1 70.64,50.39 62.16,50.39 61.44,50.96 58.5,50.96 IC2.12
N$58
  Top 0.406: R37.2 69.69,46.35 69.69,48.79 61.38,48.79 60.48,49.53 58.52,49.53 IC2.10
N$59
  Top 0.406: U$35.C 72.86,71.11 72.87,71.44 77.95,71.44 77.95,66.52 86.68,66.52 90.81,62.39 U$25.1 R34.2
N$60
  Top 0.406: R35.1 U$35.B
N$61
  Top 0.406: U$34.C 84.61,45.09 U$24.1 | U$24.1
N$62
  Top 0.406: U$34.B 72.7,46.03 R37.1
N$63
  Top 0.406: R42.1 27.29,71.77 U$20.B
N$64
  Top 0.406: IC2.2 52.13,46.42 51.59,45.88 49.33,45.88 48.21,46.99 32.23,46.99 R40.2
N$65
  Top 0.406: R47.1 51.28,72.39 R59.2 51.28,72.08 51.28,70.64 | 51.28,70.64 | 51.27,66.52 51.28,70.64 | 51.27,66.52 R53.2 C11.1 | 51.27,66.52 50.16,66.52 50.16,56.99 51.33,56.99 IC2.24
N$66
  Top 0.2: 61.28,68.58 56.2,68.58
  Top 0.305: 56.2,68.58 54.93,67.31
  Top 0.406: R48.1 55.72,73.66 55.72,71.6 54.77,70.8 53.66,70.81 R60.2 52.87,68.1 54.13,68.1 56.36,65.88 | 56.36,65.88 56.36,65.09 | 56.36,65.09 R55.2 C12.1 58.9,65.09 56.36,65.09 | 56.36,65.88 54.93,67.31 | IC2.23 52.13,57.78 53.82,57.78 53.82,59.37 56.83,59.37 59.21,61.75 61.28,61.75 61.28,68.58
N$67
  Top 0.406: R49.1 59.69,72.86 R61.2 | R61.2 | 58.9,72.07 R61.2 | 58.9,72.07 59.21,72.07 | 58.9,72.07 59.53,72.07 59.53,69.69 59.37,69.53 R54.2 C13.1 62.07,69.53 62.07,66.36 62.07,66.2 62.07,65.88 62.07,65.72 62.07,60.96 59.53,60.96 57.15,58.58 54.61,58.58 54.61,57.15 54.45,56.99 53.02,56.99 52.93,56.9 IC2.22
N$68
  Top 0.2: 57.79,75.56 54.93,75.56 | 58.9,75.56 58.1,75.56
  Top 0.254: 58.1,75.56 57.79,75.56 58.1,75.56 | 61.12,75.56 58.9,75.56
  Top 0.406: R60.1 56.2,70.64 56.99,71.28 R61.1 57.47,72.87 58.1,73.66 58.1,75.56 | R59.1 53.5,72.08 54.93,72.07 | 54.93,75.56 54.93,72.07 | 54.93,72.07 | 61.12,75.56 61.12,71.12 62.07,70.17 62.87,70.17 62.87,66.04 62.87,65.41 | 62.87,65.41 | 62.87,65.41 62.87,60.17 62.39,60.17 60.01,60.17 57.63,57.78 55.4,57.78 55.33,57.54 IC2.19
N$69  (via drill 0.6)
  Top 0.406: JP1.5 | 66.04,59.53 66.04,58.9 JP1.5 | R62.1 66.04,59.53 | R62.1 | JP1.5 | 66.04,59.53 JP1.5 | R62.1 66.04,62.71 v64.77,63.34 | IC2.29 46.35,51.03 46.2,51.12 | 46.2,51.12 | 44.45,52.23 46.2,51.12 | v44.45,53.02 44.45,53.18
  Top 2.184: v64.77,63.34 65.56,63.34
  Top 2.54: 44.45,53.18 44.45,52.23
  Bottom 0.406: v44.45,53.02 51.44,59.53 59.37,59.53 v64.77,63.34
  other vias: 66.04,57.15
N$70
  Top 0.406: JP1.1 58.43,55.09 IC2.16
N$71  (via drill 0.6)
  Top 0.406: JP1.3 63.5,58.58 62.71,58.58 60.64,58.58 60.01,57.94 57.78,55.72 IC2.17 | JP1.3
  other vias: 63.5,57.15
N$72
  Top 0.22: 25.72,72.71 26.19,72.71 26.19,75.41
  Top 0.3: 22.7,72.71 25.72,72.71
  Top 0.406: U$31.1 23.85,66.64 21.91,68.58 21.91,71.91 22.7,72.71 | 26.19,75.41 26.19,75.56 26.67,76.04 29.37,76.04 31.75,73.66 31.75,70.01 31.11,69.37 31.11,65.72 31.11,65.56 32.07,64.61 41.43,64.61 41.43,50.23 IC2.30
N$73
  Top 0.406: R42.2 30.32,65.09 31.91,63.5 40.32,63.5 40.64,63.18 40.64,49.44 IC2.31
N$74
  Top 0.406: R38.2 34.92,41.12 56.52,41.12 56.93,41.53 IC2.8
S$1
  Top 2.184: 77.31,2.38 79.85,2.38 80.33,3.33 90.01,3.33 91.44,4.76 94.14,4.76 95.57,6.03
S$2
  Top 0.406: 50.16,31.27 60.33,31.27 60.33,22.54 | 60.33,22.54 60.33,22.38 | 60.33,22.54 62.55,20.95
  Top 3.81: 62.55,20.95 65.72,20.95
S$3
  Top 0.406: 48.74,32.86 50.48,32.86 51.28,32.07 61.28,32.07 61.28,30.8 64.61,30.8 64.61,28.89 64.61,27.3
  Top 3.81: 64.61,28.89 66.36,27.15
S$4
  Top 1.016: 74.93,0.95 76.99,3.02
S$5
  Top 0.406: 61.44,33.66 64.14,33.66 64.29,33.81
S$6
  Top 0.406: 60.96,34.29 60.17,35.08 60.17,35.56
  Top 2.54: 60.17,35.56 58.1,35.56 58.1,34.77 60.33,34.77
S$7
  Top 0.406: 53.98,28.57 54.93,28.57
S$8
  Top 1.016: 56.2,2.7 53.02,2.7 53.02,3.33 56.04,3.33 56.04,1.75 56.2,2.7 | 56.2,2.7 57.94,3.33
S$9
  Top 0.406: 72.71,17.62 72.71,21.11 | E$2.1 70.8,17.62
  Top 2.54: 70.8,17.62 72.71,17.62
S$10
  Top 0.406: 73.03,14.13 73.03,14.29
  Top 1.676: 73.03,14.29 76.36,17.62
S$11
  Top 0.406: 74.14,19.53
  Top 1.27: 74.14,19.53 75.88,17.78
S$12
  Top 1.016: 48.74,5.56 49.21,5.56 49.53,5.87 53.66,5.87 54.77,4.76 54.13,4.76 53.34,5.56 53.34,6.19
S$13
  Top 0.406: 49.85,48.58 39.69,48.58 39.69,57.31 | 39.69,57.31 39.69,57.47 | 39.69,57.31 37.47,58.9
  Top 3.81: 37.47,58.9 34.29,58.9
S$14
  Top 0.406: 51.28,46.99 49.53,46.99 48.74,47.78 38.73,47.78 38.73,49.05 35.4,49.05 35.4,50.96 35.4,52.55
  Top 3.81: 35.4,50.96 33.66,52.7
S$15
  Top 0.61: 49.85,9.37 49.85,9.53 49.69,9.68 49.69,11.59
  Top 1.016: 49.85,9.37 50.64,8.57
S$16
  Top 0.406: 38.58,46.2 35.88,46.2 35.72,46.04
S$17
  Top 0.406: 39.05,46.2 38.73,45.88 37.31,45.88 37.62,45.56 39.05,45.56
S$18
  Top 0.406: 45.09,51.28 46.04,51.28
S$19
  Top 0.406: 27.3,58.74 27.3,62.23 | 29.21,62.23 E$4.1
  Top 2.54: 27.3,62.23 29.21,62.23
S$20
  Top 0.406: 26.99,65.56 26.99,65.72
  Top 1.676: 23.65,62.23 26.99,65.56
S$21
  Top 0.406: 25.88,60.33
  Top 1.27: 25.88,60.33 24.13,62.07
S$22
  Top 0.406: 93.34,54.93 93.34,48.74
  Top 1.93: U$24.2 93.34,54.93 86.95,54.93 U$27.3
S$23
  Top 0.61: 10.16,0.32 8.57,1.91 8.57,0.95 7.78,0.95 4.45,4.29 4.45,3.65 6.03,2.06
S$24
  Top 0.61: 7.78,15.08 7.78,13.81 9.21,13.81 7.94,15.08 7.94,14.61 8.26,14.29
S$25
  Top 0.61: 4.6,13.49 5.4,14.29 5.4,15.72 4.92,16.35 4.92,14.45 5.08,14.29 5.08,15.4
S$26
  Top 0.61: 88.74,79.69 90.96,77.47 93.03,77.47 95.57,74.93
S$27
  Top 0.61: 56.2,60.48 56.67,60.48 57.78,61.59
S$28
  Top 0.61: 51.75,58.9 51.44,58.58
S$29
  Top 0.61: 85.72,44.13 89.38,47.78 89.06,47.78 85.09,43.81 86.04,43.81 89.69,47.47
S$30
  Top 0.61: 75.56,37.78 75.25,37.78 74.61,38.42 75.25,38.42 75.41,38.26
S$31
  Top 0.61: 71.28,39.05 71.12,39.05 71.44,38.73 74.45,38.73
S$32
  Top 0.61: 59.37,46.83 59.37,47.15 60.01,47.78 | 60.01,47.78 | 60.01,47.78 60.48,48.26 60.96,47.78
S$33
  Top 0.61: 68.9,45.4 68.58,45.72 | 68.9,45.4 68.9,43.81 69.06,43.66 69.06,45.24 | 69.06,45.24 68.9,45.4 | 69.06,45.24 69.22,45.09 69.22,43.34
S$34
  Top 0.61: 72.71,43.5 73.5,43.5 73.5,43.34
S$35
  Top 0.61: 76.83,43.18 77.15,43.5 79.38,43.5 79.85,43.97
S$36
  Top 0.61: 91.76,36.67 91.76,34.29 88.58,37.47 89.22,37.47 91.44,35.4
S$37
  Top 0.61: 67.47,39.53 67.15,39.53 66.36,40.32
S$38
  Top 0.61: 71.28,38.89 71.28,39.05 71.12,39.21
S$39
  Top 0.61: 61.59,31.27 66.04,31.27 67.15,30.16 66.52,30.16 66.36,30.32 66.36,30.96 65.41,31.91 61.75,31.91 61.59,31.75 64.93,31.75 65.09,31.59 61.91,31.59 61.59,31.91 61.44,31.91
S$40
  Top 0.61: 38.89,32.38 39.69,31.59 40.16,31.59 40.16,32.54 40.96,33.34 39.69,34.61 30.96,34.61 33.18,32.38 38.89,32.38
S$41
  Top 0.61: 33.97,39.21 33.81,39.21 32.7,40.32 29.69,40.32 29.21,40.8 25.72,40.8 24.29,42.23 24.29,41.75 24.77,41.27
S$42
  Top 0.61: 20.16,35.88 22.07,35.88 23.34,37.15
S$43
  Top 0.813: 46.67,3.33 46.67,1.43 49.69,1.43 | 51.28,1.43 51.28,3.33 49.05,3.33 49.05,0.16 51.28,0.16 51.28,1.43 | 50.32,1.43 51.28,1.43 | 49.69,1.43 49.85,1.43 | 49.69,1.43 49.69,2.86 50.48,2.86 50.48,0.48 49.85,0.48 49.85,1.43 | 49.85,1.43 50.32,1.43 | 50.32,1.43 50.32,1.59
S$44
  Top 0.61: 10,30.96 10.16,30.96 15.4,36.2 14.76,36.2 10.48,31.91
S$45
  Top 0.406: U$23.2 6.19,48.58 4.6,46.99
  Top 1.676: 6.03,49.05 6.19,49.37 U$23.2
  Top 1.93: U$19.3 11.15,53.34 6.19,53.34 6.03,53.02 6.03,49.05
S$46
  Top 0.61: 14.45,32.38 | 14.45,32.38 11.75,29.69 12.06,29.69 14.45,32.07
S$47
  Top 0.61: 14.29,31.59 14.29,31.43 13.97,31.11
S$48
  Top 0.61: 13.97,15.4 12.86,16.51 12.86,19.53 11.43,20.95 | 11.43,20.95 | 11.43,20.95 10.95,21.43
S$49
  Top 0.61: 12.54,7.14 12.54,6.67 13.34,5.87
S$50
  Top 0.406: 89.06,11.43 | 89.06,11.43 90.17,12.54
  Top 0.61: 87.47,7.94 89.06,9.53 89.06,11.43 89.06,12.22 88.9,12.38 88.9,10 87.95,9.05
S$51
  Top 0.61: 86.68,22.07 87.31,22.07 88.27,21.11 88.27,20.8
S$52
  Top 0.61: 86.52,32.7 86.84,32.7 87.79,31.75 87.79,31.43 87.63,31.43 86.84,32.23
S$53
  Top 0.61: 13.34,57.47 12.38,58.42 12.38,61.28 11.11,62.55 11.75,62.55 13.02,61.28 | 13.02,57.94 13.02,61.28 | 13.02,61.28 13.02,61.75 12.38,62.39
S$54
  Top 0.61: 87.79,73.03 86.36,74.45
S$55
  Top 0.61: 87.15,59.85 87.47,59.85 89.06,58.26 88.42,58.26 87.31,59.37 87.31,60.01 87.15,60.17 | 87.15,60.17 | 87.15,60.17 87,60.33 87,63.66 86.04,64.61 85.88,64.61 85.57,64.29 85.88,64.29 86.52,63.66
S$56
  Top 0.61: 85.72,47.94 | 85.72,47.94 85.88,47.78 87.95,49.85 87.95,50.64 87.79,50.8 87.79,50.64 87.47,50.32 87.47,49.85 86.04,48.42 86.04,48.9 86.52,49.37
S$57
  Top 0.61: 13.34,47.31 13.18,47.31 12.22,48.26 12.22,52.07 11.91,52.39
S$58
  Top 0.61: 12.54,71.91 10.95,70.33 10.95,69.69 | 10.95,67.63 10.95,69.69 | 10.95,69.69 12.54,71.28
S$59
  Top 0.61: 4.13,73.5 4.29,73.5 5.56,74.77 4.92,74.77 4.13,73.98
S$60
  Top 0.61: 8.26,74.93 9.53,76.2 8.73,76.2 8.26,75.72
S$61
  Top 0.61: 19.68,76.52 20.48,77.31
S$62
  Top 0.61: 3.49,70.96 1.91,70.96 1.43,70.48 1.43,69.69 | 1.43,69.69 1.43,68.74 | 1.43,69.69 2.54,70.8 2.86,70.8 3.02,70.64 2.86,70.64 1.75,69.53
S$63
  Top 0.61: 3.65,70.96 | 4.13,70.48 3.65,70.96
S$64
  Top 0.61: 50.16,70.01 50.16,70.17 49.05,71.28 49.53,71.28 50.32,70.48
S$65
  Top 0.61: 44.61,75.88 44.61,76.2
S$66
  Top 0.61: 45.72,74.77 45.24,74.77 46.51,73.5
S$67  (via drill 0.6)
  Top 0.406: 6.67,24.92 6.67,28.89 6.67,31.11
  Top 0.61: 4.29,31.91 2.54,31.91 v2.54,33.18 2.54,33.97 2.7,33.97 | 4.29,31.91 4.29,33.5 | 4.29,33.97 4.76,33.97 4.76,31.91 4.29,31.91 | 2.7,33.97 4.29,33.97 | 4.29,33.5 4.29,33.97 | 4.29,33.5 3.17,33.5 3.17,32.54 | 3.17,32.54 3.97,32.54 | 3.17,32.54 2.86,32.54 2.86,32.07 5.08,32.07 | 5.08,32.07 6.67,32.07 6.67,28.89 | 5.08,32.07 5.08,34.13 2.7,34.13 2.7,33.97
  Top 1.93: U$9.3 13.06,24.92 6.67,24.92 U$6.2
  Bottom 0.406: 50.32,1.59 1.27,1.59 1.27,32.54 3.97,32.54 v2.54,33.18
S$68  (via drill 0.6)
  other vias: 50.01,1.75
S$69
  Top 0.61: 23.02,77.47 23.18,77.47 24.77,79.06 24.29,79.06 23.34,78.11 23.34,78.74 23.65,79.06
S$70
  Top 0.61: 6.19,57.15 6.35,57.15 7.14,56.36 6.83,56.36 6.35,56.83
S$71  (via drill 0.6)
  other vias: 63.5,54.61
S$72  (via drill 0.6)
  other vias: 36.51,25.24
S$73  (via drill 0.6)
  other vias: 60.96,57.15
S$74
  Top 0.406: 14.61,32.7 14.61,32.54 | 14.61,32.7 15.72,33.81 | 13.97,32.07 14.61,32.7
S$75
  Top 0.406: 42.7,18.26 43.97,19.53 46.67,19.53
S$76  (via drill 0.6)
  other vias: 50.32,78.11
S$77
  Top 0.61: 0.32,29.69
S$78  (via drill 0.6)
  other vias: 45.88,78.11
S$79
  Top 0.406: 19.53,5.87 19.68,5.87 19.84,5.71
S$80
  Top 0.61: 93.5,47.15 93.5,51.28 93.34,51.28 93.34,45.56
S$81
  Top 0.61: 5.71,46.2 6.19,46.2 6.19,49.37 5.71,49.37 5.71,46.35 5.4,46.35 5.4,48.58
S$82
  Bottom 0.406: 46.04,78.26 0.95,78.26 0.95,45.4 3.17,45.4 3.17,45.24
S$83  (via drill 0.6)
  other vias: 3.17,45.09
S$84  (via drill 0.6)
  Bottom 0.406: 50.48,78.11 98.9,78.11 98.9,45.72 v96.04,45.72
S$85
  Top 0.406: 46.83,12.22 46.2,12.86 45.09,12.86
S$86
  Top 0.406: 19.84,6.19 19.84,6.03
S$87
  Top 1.016: 8.57,44.29 10.79,42.07 10.95,42.07
S$88
  Top 0.406: 93.19,11.43 92.23,12.38 92.71,12.38 93.5,11.59
S$89
  Top 0.406: 88.42,17.94 88.42,17.78 89.22,16.99
S$90
  Top 0.406: 92.71,17.3 93.03,17.3 93.5,17.78
S$91
  Top 0.406: 92.55,27.3 92.71,27.3 93.19,27.78
S$92
  Top 0.406: 7.94,11.27 7.78,11.27 7.3,10.79
S$93
  Top 0.406: 8.41,21.43 8.1,21.43 7.14,20.48
S$94
  Top 0.406: 7.3,26.51 7.46,26.51 8.1,25.88
S$95
  Top 0.406: 10.79,25.88 | 10.79,25.88 11.59,26.67
S$96
  Top 0.406: 7.94,52.86 7.78,52.86 6.51,51.59
S$97
  Top 0.406: 8.1,63.02 7.62,63.02 6.51,61.91
S$98
  Top 0.406: 8.26,67.31 7.62,67.31 6.83,68.1
S$99
  Top 0.406: 10,67.47 10.32,67.47 11.11,68.26
S$100
  Top 0.406: 91.44,68.58 92.08,68.58 92.71,69.22
S$101
  Top 0.406: 91.92,58.26 91.92,58.42 92.71,59.21
S$102
  Top 0.406: 88.74,53.34 | 88.74,53.34 89.85,54.45 91.6,54.45 92.87,53.18
S$103
  Top 0.406: IC1.15 40.55,26.42 40.48,26.51 40.16,26.67 36.51,26.67 | 36.51,26.67 JP2.4 | 36.51,26.67 36.44,27.06 31.75,27.06 31.75,14.13 32.38,14.13 34.77,11.75
S$104
  Top 0.406: 64.14,71.75 65.25,71.75 65.25,68.1 67.63,65.72 68.26,65.72 68.26,52.79 63.57,52.79 63.5,53.18 | IC2.15 59.47,53.44 59.53,53.34 59.85,53.18 63.5,53.18 | 63.5,53.18 JP1.4
S$105
  Top 0.406: 64.14,77.15 63.18,77.15 63.18,75.09
S$106
  Top 0.406: 64.14,71.75 63.98,71.75 63.98,72.55 63.02,72.55 63.02,72.39
S$107
  Top 0.406: 63.66,71.91 63.66,71.12 63.98,71.12 63.98,71.44
S$108
  Top 0.406: 63.98,71.6 65.09,71.6 65.09,68.26 64.77,68.26 64.77,71.28 64.14,71.28
S$109
  Top 0.406: 35.72,2.7 36.35,2.7 36.35,4.92 36.99,4.92 E$11.1
S$110
  Top 0.406: 34.77,11.75 34.92,11.75 34.92,8.41 36.99,8.41 E$11.2
S$111  (via drill 0.6)
  Top 0.406: JP2.6 | JP2.6 32.7,25.24 32.54,25.24 32.54,18.57
  other vias: 33.97,25.24
S$112
  Top 0.406: 33.97,17.14 33.97,18.73 34.13,18.73 | 34.13,18.73 34.13,16.83 | 34.13,18.73 34.13,20.95
S$113  (via drill 0.6)
  Top 0.406: 67.47,61.91 67.47,54.61 67.31,54.61 JP1.6 | JP1.6
  other vias: 66.04,54.61
S$114
  Top 0.406: 65.88,57.63 66.2,57.63 66.2,62.39
VCC
  Top 0.406: U$5.3 | U$5.3
  Top 0.813: PAD1.1 97.95,16.35 97.95,19.37 | 97.95,20.16 U$4.3
  Top 1.676: U$5.3 96.52,30.48
  Top 1.778: U$3.3 | U$3.3 U$4.3 | U$4.3 U$5.3 | U$4.3 97.95,20.16 | U$3.3 97.95,11.59
  Top 1.93: 97.95,11.59 97.95,19.37 97.95,20.16 | 96.52,30.48 97.79,29.21 97.79,20.48 97.95,20.32 97.95,28.89 96.52,30.32 | U$4.3
VCC1
  Top 0.406: 2.06,59.69 2.86,59.69 PAD5.1 | U$23.3 | U$23.3 | U$22.3
  Top 1.676: 3.49,49.37 U$23.3
  Top 1.778: U$22.3 U$21.3 | U$21.3 | U$23.3 U$22.3 | U$22.3 2.06,59.69 | U$21.3 2.06,68.26
  Top 1.93: 2.06,59.69 2.06,68.26 | 3.49,49.37 2.22,50.64 2.22,59.37 2.06,59.53 2.06,50.96 3.49,49.53 | U$22.3
VDD
  Top 0.2: 60.8,4.6 63.5,4.6 | 56.36,4.6 59.05,4.6
  Top 0.22: 60.8,4.6 | 60.8,4.6 60.64,4.76
  Top 0.406: R25.1 64.45,4.61 64.45,4.6 63.5,4.6 | 60.8,4.6 60.64,4.76 | 60.17,5.24 60.8,4.6 | 60.17,5.24 R26.1 | R26.1 | R26.1 R27.1 R26.1 | R26.1 | R26.1 | 60.17,4.6 60.17,5.24 | R26.1 | 60.17,4.6 60.8,4.6 | 59.05,4.6 60.17,4.6 | IC1.25 50.65,25.55 50.64,11.43 50.64,10.32 51.59,9.37 54.29,9.37 54.29,7.3 56.36,5.24 56.36,4.6
VDD1
  Top 0.2: 39.21,75.25 36.51,75.25 | 43.66,75.25 40.96,75.25
  Top 0.22: 39.85,75.25 39.21,75.25 39.37,75.25
  Top 0.406: R56.1 35.56,75.25 36.51,75.25 | 39.85,75.25 39.37,75.25 | R57.1 | R57.1 R58.1 R57.1 | R57.1 | R57.1 | 39.85,75.25 R57.1 | R57.1 | 40.96,75.25 39.85,75.25 | IC2.25 49.37,54.3 49.37,68.42 49.37,69.53 48.42,70.48 45.72,70.48 45.72,72.55 43.66,74.61 43.66,75.25
VEE
  Top 0.406: R13.1 R25.2 R21.2 C2.1 67.63,10.8 67.94,11.11 67.94,13.97 67.47,14.45 57.78,14.45 57.78,24.29 53.02,24.29 53.02,27.78 52.7,27.94 50.25,27.94 IC1.28
VEE1
  Top 0.406: R44.1 R56.2 R52.2 C8.1 | C8.1 | C8.1 32.38,69.05 32.07,68.74 32.07,65.88 32.54,65.41 42.23,65.41 42.23,55.56 46.99,55.56 46.99,52.07 47.31,51.91 49.77,51.91 IC2.28
VPP
  Top 0.2: 52.39,11.75 57.31,11.75
  Top 0.22: 57.31,11.75 57.63,11.43
  Top 0.406: R14.1 R26.2 62.07,10.01 R20.2 C3.1 58.26,10.8 57.63,11.43 | 52.39,11.75 52.23,11.75 52.23,27.15 50.24,27.15 IC1.27
VPP1
  Top 0.2: 47.62,68.1 42.7,68.1
  Top 0.22: 42.7,68.1 42.39,68.42
  Top 0.406: R45.1 R57.2 37.94,69.84 R51.2 C9.1 41.75,69.05 42.39,68.42 | 47.62,68.1 47.78,68.1 47.78,52.7 49.77,52.7 IC2.27
VSS
  Top 0.406: R15.1 57.15,5.55 56.04,6.67 56.04,7.94 R27.2 55.88,10.8 | 55.88,10.8 R19.2 | 55.88,10.8 53.97,10.8 C4.1 52.23,10.8 51.44,10.79 51.44,26.35 50.27,26.35 IC1.26
VSS1
  Top 0.406: R46.1 42.86,74.3 43.97,73.18 43.97,71.91 R58.2 44.13,69.05 | 44.13,69.05 R50.2 | 44.13,69.05 46.04,69.05 C10.1 47.79,69.05 48.58,69.06 48.58,53.5 49.75,53.5 IC2.26
(copper drawn outside any net)
  shapes: Top area x431

## Text on the board
Top: 4-fach Motortreiber v1.0